# Altium PCB PCB1.PcbDoc
Units mm, origin at the board's own origin, x right, y up, seen from the top; angles counter-clockwise.
Board outline 30.73 x 26.67 mm, 2 copper layers (Top Layer, Bottom Layer); 33 components, 30 nets, 173 pads, 58 vias.
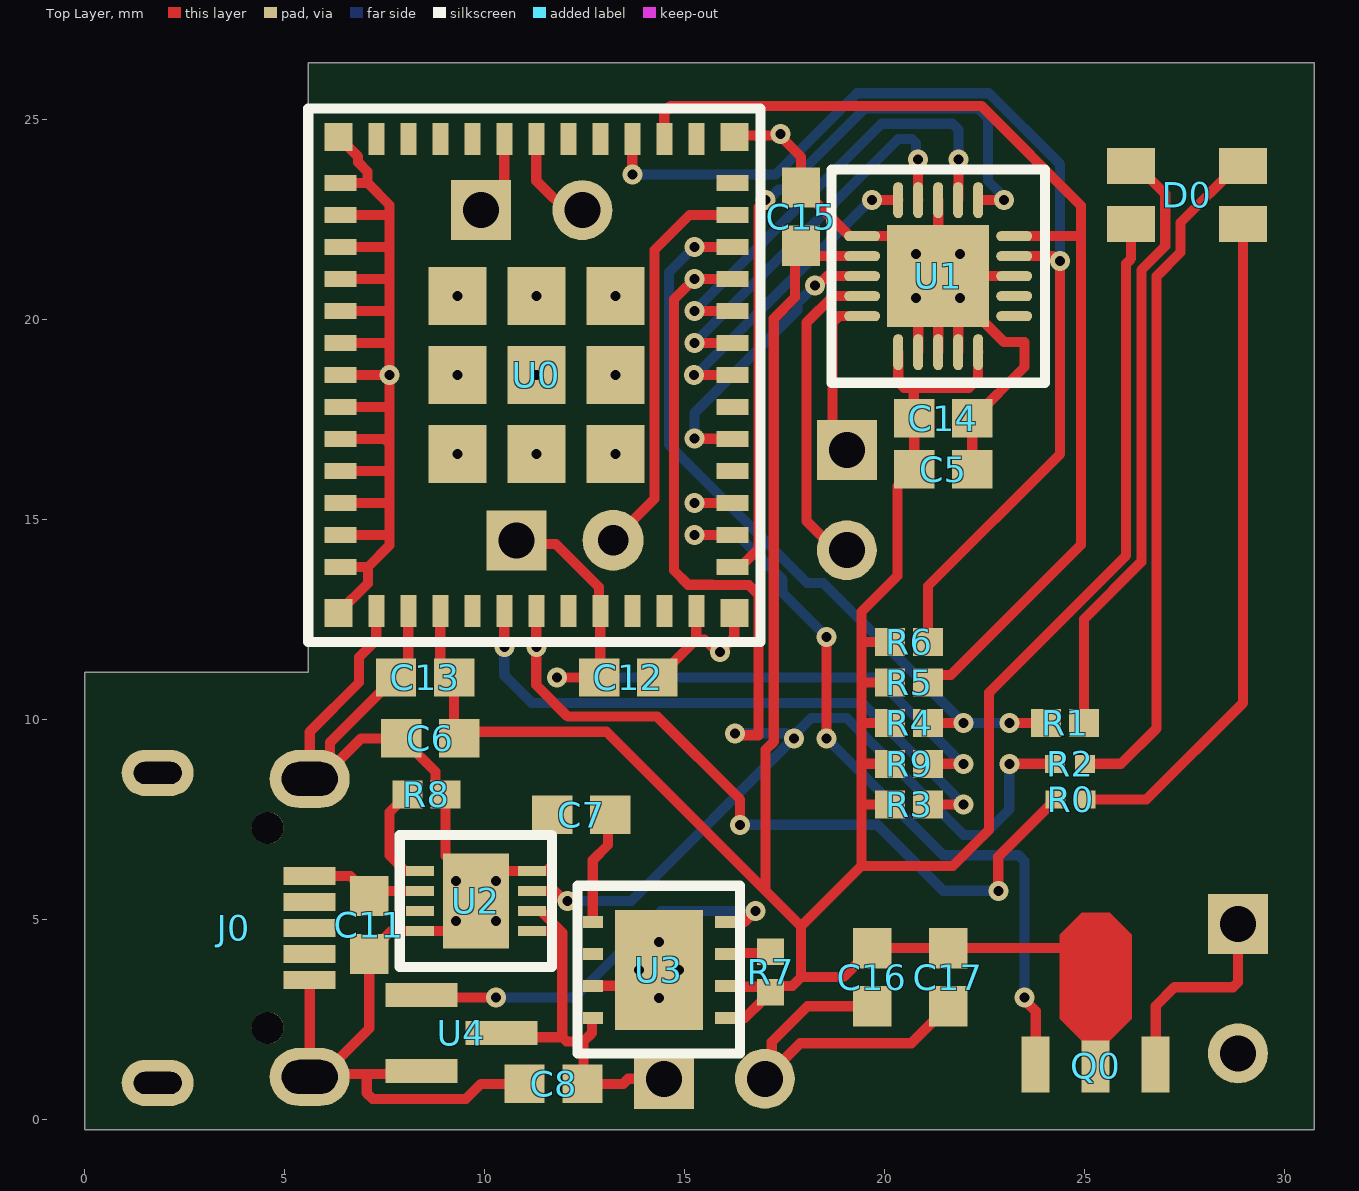
[diagram p0: Top Layer view]
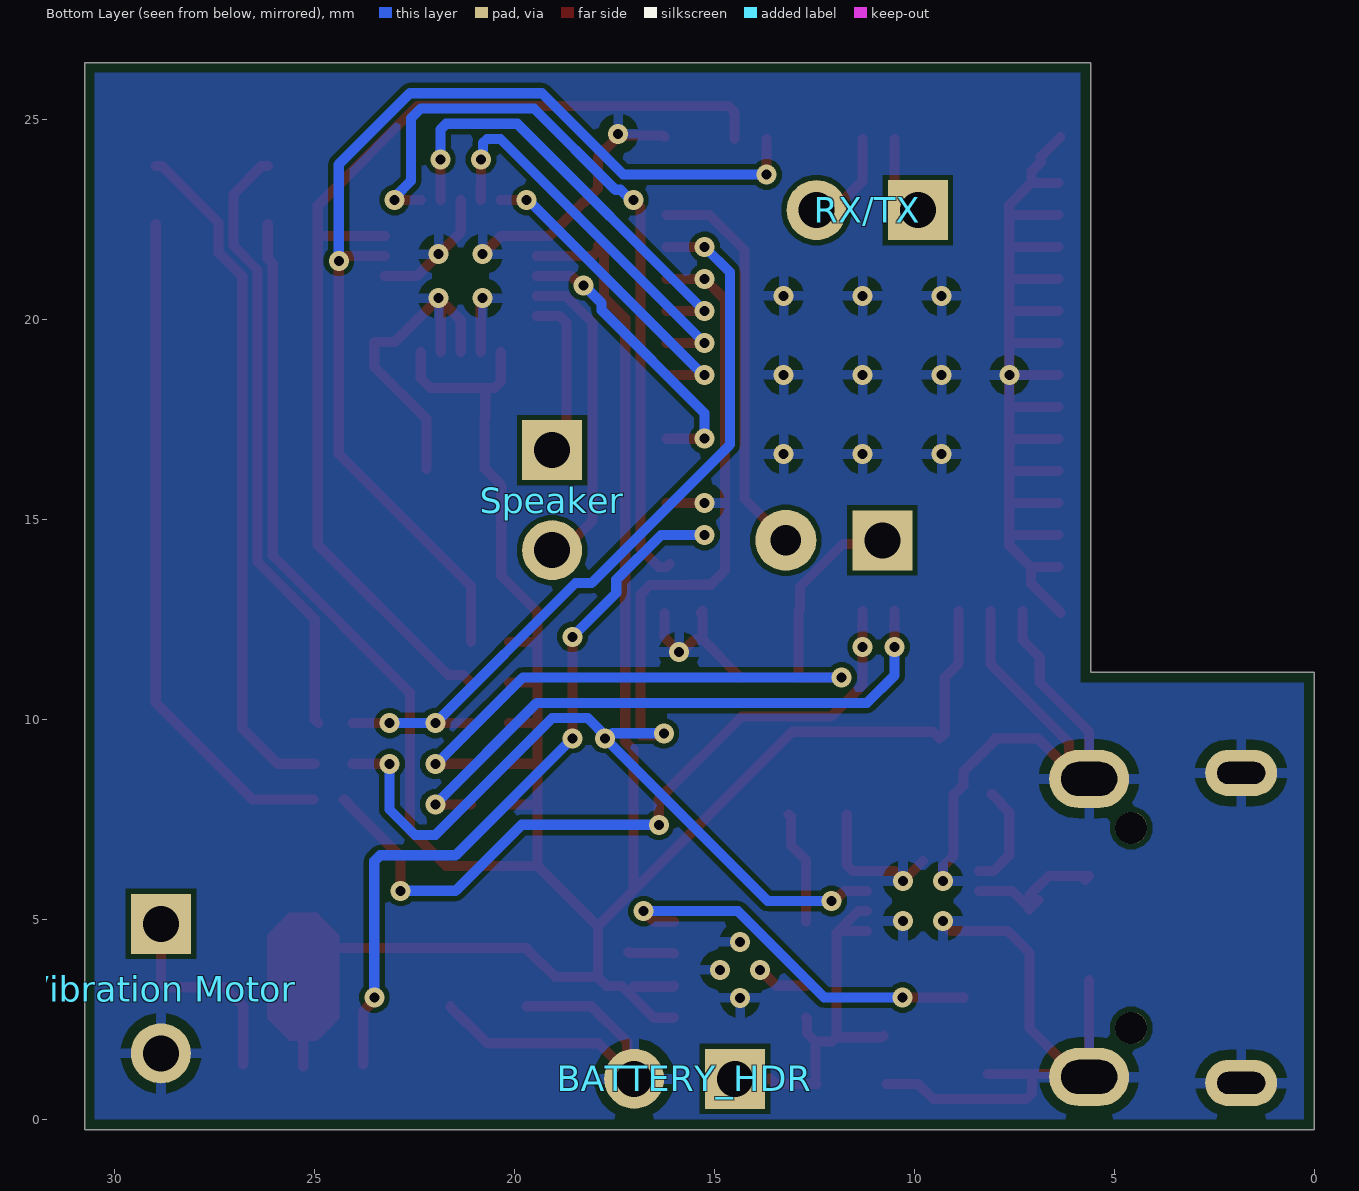
[diagram p1: Bottom Layer view, seen from below]

## Layer stack, top to bottom
Top Solder: solder mask 0.0102, Solder Resist, Dk 3.5
Top Layer: signal copper 0.0356
Dielectric 1: dielectric 0.32, FR-4, Dk 4.8
Bottom Layer: signal copper 0.0356
Bottom Solder: solder mask 0.0102, Solder Resist, Dk 3.5

## Board outline
5.588,26.416 5.588,11.176 0,11.176 0,-0.254 30.734,-0.254 30.734,26.416

## Design rules (kind name [scope] priority, off if disabled: settings)
Clearance [All] p1: gap=0.127 ignorepadtopadclearanceinfootprint=FALSE except(0: Arc-Hole Track-Hole SMDPad-Hole THPad-Hole Via-Hole Fill-Hole Poly-Hole Region-Hole Text-Hole)
ComponentClearance [All] p1: gap=0.127 collisioncheckmode=3 verticalgap=0.254 showdistances=FALSE
HoleSize [All] p1: absolutevalues=TRUE maxlimit=2.54 minlimit=0.25 maxpercent=80.000 minpercent=20.000
HoleToHoleClearance [All] p1: gap=0.127 allowstackedmicrovias=TRUE
MinimumSolderMaskSliver [All] p1: minsoldermaskwidth=0.1
PolygonConnect [All] p1: connectstyle=Relief reliefconductorwidth=0.254 reliefentries=4 polygonreliefangle="90 Angle" airgapwidth=0.254
RoomDefinition Schematic_MuSSAP [InComponentClass('Schematic_MuSSAP')] p1: confinementstyle=ConfineIn formatcopy=TRUE lockcomponents=FALSE outline -11.303,-30.988 39.497,-30.988 39.497,-5.588 -11.303,-5.588
RoutingVias [All] p1: holewidth=0.25 width=0.5 viastyle="Through Hole" minholewidth=0.25 minwidth=0.5 maxholewidth=1 maxwidth=1.5
SolderMaskExpansion [All] p1: expansion=0.102 istentingtop=FALSE
Width [All] p1: maxlimit=0.508 minlimit=0.127 preferedwidth=0.254 minimp=50.000000 maximp=50.000000 favimp=50.000000
26 further rules are at their usual default settings.

## Components (designator, comment, footprint, x,y, rotation, side; value= is the part's Value field where it differs from the comment)
BATTERY_HDR "" HDR1X2#1 14.478,1.016 r0 bottom
C5 "10uF" FP-C0603-CG-IPC_B 21.463,16.256 r180 top
C6 "10uF" FP-C0603-CG-IPC_B 8.636,9.525 r0 top
C7 "0.1uF" FP-C0603-CG-IPC_B 12.41,7.62 r0 top
C8 "10uF" FP-C0603-CG-IPC_B 11.72,0.889 r0 top
C11 "10uF" FP-C0603-CG-IPC_B 7.112,4.862 r270 top
C12 "0.1uF" FP-C0603-CG-IPC_B 13.589,11.049 r180 top
C13 "0.1uF" FP-C0603-CG-IPC_B 8.509,11.049 r0 top
C14 "0.1uF" FP-C0603-CG-IPC_B 21.463,17.526 r180 top
C15 "0.1uF" FP-C0603-CG-IPC_B 17.907,22.57 r270 top
C16 "10uF" FP-C0603-CG-IPC_B 19.685,3.556 r90 top
C17 "10uF" FP-C0603-CG-IPC_B 21.59,3.556 r90 top
D0 "AAA3528LSEEZGKQBKS" FP-AAA3528LSEEZGKQBKS-MFG 27.559,23.114 r180 top
J0 "629105150521" 629105150521 2.724,4.786 r270 top
Q0 "BSS606N H6327" INF-PG-SOT-89_N 25.273,2.921 r90 top
R0 "15" RESC1005X40X25LL05T10 24.644,8.001 r0 top
R1 "62" RESC1005X35X25ML10T10 24.511,9.906 r0 top
R2 "22" RESC1005X40X25LL05T10 24.632,8.89 r180 top
R3 "45k" RESC1005X35X25ML10T10 20.607,7.874 r0 top
R4 "45k" RESC1005X35X25ML10T10 20.607,9.906 r0 top
R5 "3.3k" RESC1005X35X25ML10T10 20.607,10.922 r0 top
R6 "3.3k" RESC1005X35X25ML10T10 20.607,11.938 r0 top
R7 "330k" FP-MCS0402-IPC_A 17.145,3.683 r90 top
R8 "4.99k" RESC1005X35X25ML10T10 8.542,8.128 r180 top
R9 "45k" RESC1005X35X25ML10T10 20.607,8.89 r0 top
RX/TX "" HDR1X2#2 10.033,22.733 r0 bottom
Speaker "" HDR1X2#3 19.05,16.129 r270 bottom
U0 "SMD MODULE, ESP32-C3FH4, PCB ANT   Source:  Datasheet" ESP32C3MINI1H4 11.288,18.612 r90 top
U1 "SSM2518_QFN_4mmx4mmx0.75mm_CP-20-8" QSSM2518_FN50P400X400X80_HS-21N 21.336,21.082 r180 top
U2 "LTC4058EDD-4.2" LT-DD-8_V 9.779,5.461 r180 top
U3 "LP2989AILD-3.3/NOPB" LDC08A 14.35,3.74 r0 top
U4 "MCP112T-290E/TT" SOT-23-TT3_M 9.414,2.159 r0 top
"Vibration Motor" "" HDR1X2#4 28.829,4.191 r270 bottom

## Footprints (in the part's own frame and the unit in brackets; to place one, negate y for a bottom-side part, rotate by r counter-clockwise, add the part's x,y. Pads: shape width x height; smd on the part's side, far side on the other; paste and mask are expansions set on the pad)
629105150521 [mm] "Micro USB 2.0 SMT Type B Horizontal 5 Contacts High Current"
  rect 0.45x1.3 smd: 1(-1.3,2.9) 2(-0.65,2.9) 3(0,2.9) 4(0.65,2.9) 5(1.3,2.9)
  round 0.8 hole 0.8 unplated: MH1(-2.5,1.85) MH2(2.5,1.85)
  oval 1.15x1.8 hole 0.55 slot 1.2 at 90 deg: Shell(-3.875,-0.9) Shell(3.875,-0.9)
  oval 1.45x2 hole 0.85 slot 1.4 at 90 deg: Shell(-3.725,2.9) Shell(3.725,2.9)
  body extent -4,-3.3 4,3.3, height 2.75
ESP32C3MINI1H4 [mil]
  rect 31.5x15.75 smd: 1(-232.28,157.48) 2(-232.28,125.98) 3(-232.28,94.49) 4(-232.28,62.99) 5(-232.28,31.5) 6(-232.28,0) 7(-232.28,-31.5) 8(-232.28,-62.99) 9(-232.28,-94.49) 10(-232.28,-125.98) 11(-232.28,-157.48) 25(232.28,-157.48) 26(232.28,-125.98) 27(232.28,-94.49) 28(232.28,-62.99) 29(232.28,-31.5) 30(232.28,0) 31(232.28,31.5) 32(232.28,62.99) 33(232.28,94.49) 34(232.28,125.98) 35(232.28,157.48)
  rect 15.75x31.5 smd: 12(-188.98,-192.91) 13(-157.48,-192.91) 14(-125.98,-192.91) 15(-94.49,-192.91) 16(-62.99,-192.91) 17(-31.5,-192.91) 18(0,-192.91) 19(31.5,-192.91) 20(62.99,-192.91) 21(94.49,-192.91) 22(125.98,-192.91) 23(157.48,-192.91) 24(188.98,-192.91) 36(188.98,192.91) 37(157.48,192.91) 38(125.98,192.91) 39(94.49,192.91) 40(62.99,192.91) 41(31.5,192.91) 42(0,192.91) 43(-31.5,192.91) 44(-62.99,192.91) 45(-94.49,192.91) 46(-125.98,192.91) 47(-157.48,192.91) 48(-188.98,192.91)
  rect 57.09x57.09 smd: 49(0,0) 50(77.76,77.76) 51(0,77.76) 52(-77.76,77.76) 53(-77.76,0) 54(-77.76,-77.76) 55(0,-77.76) 56(77.76,-77.76) 57(77.76,0)
  rect 27.56x27.56 smd: 58(-234.25,194.88) 59(-234.25,-194.88) 60(234.25,-194.88) 61(234.25,194.88)
FP-AAA3528LSEEZGKQBKS-MFG [mm]
  rect 1.2x0.9 smd paste+0 mask+0: 1(1.4,-0.725) 2(-1.4,-0.725) 3(-1.4,0.725) 4(1.4,0.725)
  body extent -2.1,-1.6 2.1,1.6, height 0.25
FP-C0603-CG-IPC_B [mm]
  rect 1.007x0.958 smd paste+0 mask+0: 1(-0.726,0) 2(0.726,0)
  body extent -1.48,-0.73 1.48,0.73, height 0.25
FP-MCS0402-IPC_A [mm]
  rect 0.665x0.672 smd paste+0 mask+0: 1(-0.504,0) 2(0.504,0)
  body extent -1.04,-0.54 1.04,0.54, height 0.25
HDR1X2#1 [mm] "Connector; Header; 2 Position"
  rect 1.5x1.5 hole 0.9: 1(0,0)
  round 1.5 hole 0.9: 2(2.522,0)
HDR1X2#2 [mm] "Connector; Header; 2 Position"
  rect 1.5x1.5 hole 0.9: 1(-0.127,0)
  round 1.5 hole 0.9: 2(2.405,0)
HDR1X2#3 [mm] "Connector; Header; 2 Position"
  rect 1.5x1.5 hole 0.9: 1(-0.6,0)
  round 1.5 hole 0.9: 2(1.9,0)
HDR1X2#4 [mm] "Connector; Header; 2 Position"
  rect 1.5x1.5 hole 0.9: 1(-0.7,0)
  round 1.5 hole 0.9: 2(2.54,0)
INF-PG-SOT-89_N [mm] "SOT89, 3-Leads, Body 4.5x2.5mm, Pitch 1.5mm, IPC Medium Density"
  rect 1.4x0.7 smd: 1(-1.55,1.5) 3(-1.55,-1.5)
  rect 1.3x0.7 smd: 2(-1.6,0)
  Top Layer region: -0.95,0.35 -0.4,0.9 1.7,0.9 2.25,0.35 2.25,-0.35 1.7,-0.9 -0.4,-0.9 -0.95,-0.35
  body extent -1.05,-2.3 1.55,2.3, height 1.6
LDC08A [mm] "PSON, 8-Leads, Body 4x4mm, Pitch 0.8mm, NSC Recommended"
  rect 0.5x0.3 smd paste-0.15 mask+0.051: 1(-1.65,1.2) 2(-1.65,0.4) 3(-1.65,-0.4) 4(-1.65,-1.2) 5(1.65,-1.2) 6(1.65,-0.4) 7(1.65,0.4) 8(1.65,1.2)
  rect 2.2x3 smd paste-1.5 mask+0.051: 9(0,0)
  body extent -2.05,-2.05 2.05,2.05, height 0.8
LT-DD-8_V [mm] "SON, 8-Leads, Body 3x3mm, Pitch 0.5mm, Thermal Pad 1.65x2.38 mm"
  rect 0.7x0.25 smd mask+0.102: 1(-1.4,0.75) 2(-1.4,0.25) 3(-1.4,-0.25) 4(-1.4,-0.75) 5(1.4,-0.75) 6(1.4,-0.25) 7(1.4,0.25) 8(1.4,0.75)
  rect 1.65x2.38 smd mask+0.102: 9(0,0)
  body extent -1.5,-1.5 1.5,1.5, height 0.8
QSSM2518_FN50P400X400X80_HS-21N [mm] "QFN, 20-Leads, Body 4,00x4,00mm, Pitch 0,50mm, Thermal Pad 2,55x2,55mm, IPC Medium Density"
  oval 0.9x0.25 smd: 1(-1.9,1) 2(-1.9,0.5) 3(-1.9,0) 4(-1.9,-0.5) 5(-1.9,-1) 11(1.9,-1) 12(1.9,-0.5) 13(1.9,0) 14(1.9,0.5) 15(1.9,1)
  oval 0.25x0.9 smd: 6(-1,-1.9) 7(-0.5,-1.9) 8(0,-1.9) 9(0.5,-1.9) 10(1,-1.9) 16(1,1.9) 17(0.5,1.9) 18(0,1.9) 19(-0.5,1.9) 20(-1,1.9)
  rect 2.55x2.55 smd: 21(0,0)
  body extent -2.05,-2.05 2.05,2.05, height 0.8
RESC1005X35X25ML10T10 [mm] "Chip Resistor, 2-Leads, Body 1.00x0.50mm, IPC Low Density"
  rect 0.75x0.7 smd: 1(-0.475,0) 2(0.475,0)
  body extent -0.55,-0.3 0.55,0.3, height 0.35
RESC1005X40X25LL05T10 [mm] "Chip Resistor, 2-Leads, Body 1.00x0.50mm, IPC High Density"
  rect 0.5x0.45 smd: 1(-0.375,0) 2(0.375,0)
  body extent -0.53,-0.27 0.53,0.28, height 0.4
SOT-23-TT3_M [mm] "SOT23, 3-Leads, Body 2.9x1.3mm, Pitch 0.95mm, Lead Span 2.4mm, IPC Low Density"
  rect 1.8x0.6 smd: 1(-1,0.95) 2(-1,-0.95) 3(1,0)
  body extent -0.7,-1.52 0.7,1.53, height 1.12

## Part data
BATTERY_HDR RX/TX Speaker "Vibration Motor": library part "Header 2", "Header, 2-Pin", LatestRevisionDate=17-Jul-2002, LatestRevisionNote="Re-released for DXP Platform.", Publisher="Altium Limited"
C5 C6 C7 C8 C11 C12 C13 C14 C15 C16 C17: library part CMP-2006-03069-2, "CAP CER 0.1UF 25V Y5V 0603", Capacitance=100nF, Case Code (Imperial)=0603, Case Code (Metric)=1608, Dielectric=Y5V, Dielectric Material=Ceramic, Max Operating Temperature=85°C, Min Operating Temperature=-30°C, Package Quantity=1, Tolerance=80%, Voltage=25V, Case/Package=0603, Construction=Flat, Depth=0.8mm, Dissipation Factor=7%, Height=0.8mm, Lead Free="Lead Free", Lead Pitch=0.7mm, Length=1.6mm, Mount="Surface Mount", Number of Pins=2, Packaging="Tape and Reel", Radiation Hardening=No, REACH SVHC="No SVHC", RoHS Compliant=Yes, Series=C, Termination=SMD/SMT, Thickness=0.034inch, Voltage Rating=25V, Voltage Rating (DC)=25V, Width=0.031inch
D0: library part CMP-44529-000043-1, "LED RGB CLEAR 4SMD", Case/Package=PLCC, Color=Blue, Forward Voltage=2.7V, Lens Color=Colorless, Test Current=2mA, Dominant Wavelength=465nm, Height=2.1mm, Length=3.2mm, Lens Transparency=Clear, Luminous Intensity=30mcd, Mount="Surface Mount", Number of Pins=4, Packaging="Tape and Reel", Viewing Angle=120°, Width=2.8mm
J0: library part CMP-1502-03252-1, "Micro USB 2.0 Type B Receptacle WR-COM, Horizontal, SMT, with Pegs, High Current at Pin 1 & Pin 5", Contact Resistance=30mOhm, Manufacturer="Wurth Elektronik", Operating Temperature=-40to85degC, Rated Current=3A, Working Voltage=30VAC, Connector Type=MicroUSB2.0TypeB, Datasheet URL=https://katalog.we-online.de/em/datasheet/629105150521.pdf, Gender=Receptacle, Manufacturer URL=http://www.we-online.de, Mounting Technology=SMT, Orientation=Horizontal, Package Reference=629105150521, Packaging=TapeandReel, Part Number=629105150521, Publisher=WurthElektronik
Q0: library part CMP-1149-00049-1, "OptiMOS-3 Small-Signal-Transistor, 60 V VDS, 3.2 A ID, PG-SOT-89, Reel, Green", Manufacturer=Infineon, ComponentLink1Description="Manufacturer URL", ComponentLink1URL=http://www.infineon.com/, ComponentLink2Description=Datasheet, ComponentLink2URL=http://www.infineon.com/dgdl/BSS606N_2.2.pdf?folderId=db3a3043156fd573011622e10b5c1f67&fileId=db3a30433dfcb54c013dfd4f43ed0120, ComponentLink3Description="Package Specification", ComponentLink3URL=http://www.infineon.com/cms/packages/SMD_-_Surface_Mounted_Devices/SOT/SOT089_xSC62x.html?__locale=en, DatasheetVersion="Rev. 2.2", Green=TRUE, Halogen-free=TRUE, ID (max)="3.2Â A", Mounting Technology="Surface Mount", PackageDescription="3-Pin Small Outline Transistor Package, 4.5 x 2.5 mm Body, 1.5 mm Pitch", PackageReference=PG-SOT-89, PackageVersion=Apr-08, Packing=Reel, PartNumber="BSS606N H6327", Polarity=N, RDS (on) (max)="60 mOhm", RevisionNote="Lost Devices pt2", VDS (max)="60 V"
R0: library part CMP-2002-07413-1, Manufacturer="Yageo / Phycomp", Part Number=RC0402FR-0715RL
R1 R3 R4 R5 R6 R8 R9: library part CMP-2002-02949-1, Manufacturer=Yageo, Part Number=RT0402BRD073KL
R2: library part CMP-2002-07520-1, Manufacturer="Yageo / Phycomp", Part Number=RC0402FR-0722RL
R7: library part CMP-02407-001123-1, "RES SMD 1.2K OHM 1% 1/10W 0402", Case/Package=0402, Max Operating Temperature=125°C, Max Power Dissipation=100mW, Min Operating Temperature=-55°C, Package Quantity=10000, Resistance=270kR, Temperature Coefficient=50ppm/°C, Tolerance=1%, Composition="Thin Film", Contact Plating=Tin, Depth=0.5mm, Height=0.015inch, Lead Free="Lead Free", Length=0.039inch, Military Standard=Not, Number of Terminations=2, Packaging="Tape and Reel", Radiation Hardening=No, Width=0.02inch
U0: library part ESP32-C3-MINI-1-H4, Manufacturer_Name="Espressif Systems", Package=ESP32C3MINI1H4, DeviceSetName=ESP32-C3-MINI-1-H4, GateName_1=G$1, Height=2.55mm, LibraryName=ESP32-C3-MINI-1-H4, Manufacturer_Part_Number=ESP32-C3-MINI-1-H4, Mouser_Part_Number=356-ESP32-C3-MINI1H4, Mouser_Price-Stock=https://www.mouser.co.uk/ProductDetail/Espressif-Systems/ESP32-C3-MINI-1-H4?qs=stqOd1AaK78JkwNX13Q9hQ%3D%3D, SymbolName_1=ESP32-C3-MINI-1-H4
U2: library part CMP-0471-00145-1, "Standalone Linear Li-Ion Battery Charger with Thermal Regulation, 4.25 to 6.5 V Vin, 8-pin SON (DD-8), -40 to 85 degC", Float Voltage="4.2 V", Manufacturer="Linear Technology", Max Charge Current(A)=0.95, Battery Chemistry="Li-Ion, Li-Polymer", Charge Termination=C/10, Code_JEDEC=MO-229, ComponentLink1Description="Manufacturer URL", ComponentLink1URL=http://www.linear.com/, ComponentLink2Description=Datasheet, ComponentLink2URL=http://cds.linear.com/docs/en/datasheet/405842fs.pdf, ComponentLink3Description="Package Specification", ComponentLink3URL=http://cds.linear.com/docs/en/packaging/DFN_8_05-08-1698.pdf, Mounting Technology="Surface Mount", Number of Cells=1, PackageDescription="8-Pin Plastic DFN, Body 3 x 3 mm, Pitch 0.5 mm", PackageReference=DD-8, PackageVersion=Jun-10, PartNumber=LTC4058EDD-4.2, RoHS=FALSE, Type of Charger=Linear, Vin Max(V)=6.5, Vin Min(V)=4.25
U3: library part CMP-0062-01460-2, "Micropower/Low Noise, 500 mA Ultra Low-Dropout Regulator, 8-pin LLP, Pb-Free", Manufacturer="National Semiconductor", PackageTopMarking=NS*UZXYTT*L01JA, PowerWise=N, ComponentLink1Description="LP2989 Datasheet", ComponentLink1URL=http://www.national.com/ds/LP/LP2989.pdf, ComponentLink2Description="LP2989 Web Page", ComponentLink2URL=http://www.national.com/pf/LP/LP2989.html, ComponentLink3Description="LDC08A Package Page", ComponentLink3URL=http://www.national.com/packaging/folders/ldc08a.html, CompType="LDO IC", DatasheetVersion=Feb-2005, PackageDescription="LLP, Plastic, Dual, 4 x 4 x 0.75mm Body, 8 Lead, 0.8mm Pitch", PackageReference=LDC08A, PackageVersion="revB, Jun-2003", PinCount=8, RevisionNote="Component URLs added", RoHS=Y
U4: library part CMP-0130-00041-1, "1.75Î¼A Micropower Voltage Detector, Push-Pull Output, 2.90V, 3-Pin SOT-23, Extended Temperature, Tape and Reel", Code_IPC=SOT23-3, DatasheetVersion="revD, Jun-2005", PackageDescription="3-Lead Plastic Small Outline Transistor (TT) [SOT-23]", PackageReference=SOT-23-TT3, PackageVersion="revBB, Aug-2009"

## Free pads (board coordinates)
  rect 1.5x1.5 hole 0.9: 4(10.795,14.478)
  round 1.524 hole 0.762: 5(13.208,14.478)

## Via types
v1: diameter 0.5, hole 0.25, Top Layer to Bottom Layer, 58 vias

## Nets (pads, with @x,y where several pads share a name; then routed paths per layer and width w, separated by ;. In a path a pad name is that pad's centre, name@x,y a point inside that pad or via, vN(x,y) a via of type N, cw(c..) or ccw(c..) an arc to the next point about the centre after c; other vN are vias at no path point)
3V3: C5.2 C6.2 C13.2 C14.2 C15.2 C16.2 C17.2 D0.4 Q0.2 R3.1 R4.1 R5.1 R6.1 R7.1 R9.1 U0.3 U1.12 U1.16 U1.20 U3.5 U3.6 | length 89.4
  Top Layer w0.254: U0.3 8.888,11.396 C13.2 9.235,9.652 C6.2 9.526,9.689 13.044,9.689 17.018,5.715 ; U3.5 16.506,2.54 16.936,2.97 16.936,2.974 17.141,3.179 R7.1 ; U3.6 16.023,3.317 17.007,3.317 R7.1 ; C15.2@17.906,21.717 18.041,21.582 U1.12 ; C15.2@17.906,21.843 17.756,21.693 17.756,20.55 17.223,20.017 17.223,9.445 17.018,9.24 17.018,5.715 ; R3.1 19.419,7.874 ; R9.1 19.419,8.89 ; R4.1 19.419,9.906 ; R5.1 19.419,10.922 ; R6.1 19.419,11.938 ; U1.16 20.336,18.437 20.485,18.288 20.723,18.288 ; U1.20 22.334,19.18 22.334,18.524 22.098,18.288 20.723,18.288 ; Q0.2 25.273,4.133 25.124,4.282 C17.2 C16.2 19.685,4.258 19.333,3.906 19.309,3.906 18.959,3.556 17.907,3.556 ; D0.4 26.159,21.519 26.035,21.395 26.035,14.097 22.606,10.668 22.606,7.239 21.705,6.338 19.419,6.338 ; 17.018,5.715 17.907,4.826 ; R7.1 17.302,3.337 17.688,3.337 17.907,3.556 ; 17.907,3.556 17.907,4.826 ; 17.907,4.826 19.419,6.338 ; 19.419,6.338 19.419,7.874 ; 19.419,7.874 19.419,8.89 ; 19.419,8.89 19.419,9.906 ; 19.419,9.906 19.419,10.922 ; 19.419,10.922 19.419,11.938 ; 19.419,11.938 19.419,12.688 20.32,13.589 20.32,15.839 20.361,15.88 20.361,15.904 20.713,16.256 C5.2 C14.2 20.723,17.54 20.723,18.288
AUD_EN: U0.16 U1.13 | length 7.3
  Top Layer w0.254: v1(15.24,17.018) 15.243,17.015 16.185,17.015 U0.16 ; v1(18.26,20.851) 18.327,20.851 18.558,21.082 U1.13
  Bottom Layer w0.254: v1(15.24,17.018) 15.24,17.653 17.813,20.226 17.813,20.403 v1(18.26,20.851)
BAT+: BATTERY_HDR.1 C8.2 U2.1 U2.2 U3.4 U4.3 | length 9.8
  Top Layer w0.254: U4.3@10.763,2.093 10.802,2.054 11.938,2.054 ; U2.1 11.789,4.711 ; U2.2 11.4,5.211 11.938,4.673 11.938,2.054 ; C8.2 C8.2@12.469,0.889 ; U3.4 12.677,2.517 12.677,2.158 12.469,1.95 ; BATTERY_HDR.1 13.589,1.016 13.462,0.889 C8.2@12.469,0.889 ; 11.938,2.054 12.042,1.95 12.469,1.95 ; C8.2@12.469,0.889 12.469,1.95
BCLK: U0.20 U1.7 | length 11.3
  Top Layer w0.254: v1(15.24,20.212) U0.20@16.188,20.212 ; U1.7 21.838,22.984 21.838,23.366 21.844,23.372 v1(21.844,24.003)
  Bottom Layer w0.254: v1(15.24,20.212) 19.92,24.892 21.695,24.892 21.844,24.743 v1(21.844,24.003)
BLUE_LED: R0.1 U0.6 | length 18.8
  Top Layer w0.254: U0.6 v1(11.288,11.811) 11.288,10.859 12.077,10.07 14.314,10.07 16.383,8.001 v1(16.383,7.366) ; v1(22.838,5.715) 22.838,6.57 24.146,7.878 24.146,7.903 24.244,8.001 R0.1
  Bottom Layer w0.254: v1(16.383,7.366) 19.812,7.366 21.463,5.715 v1(22.838,5.715)
EN: C12.2 pad.4 R9.2 U0.8 | length 17.8
  Top Layer w0.254: pad.4 10.888,14.385 11.777,14.385 12.853,13.309 12.853,12.747 U0.8 12.888,11.074 C12.2 v1(11.811,11.049) ; R9.2 v1(21.971,8.89)
  Bottom Layer w0.254: v1(11.811,11.049) 19.781,11.049 21.94,8.89 v1(21.971,8.89)
GND: "Vibration Motor.2" BATTERY_HDR.2 C5.1 C6.1 C7.1 C8.1 C11.2 C12.1 C13.1 C14.1 C15.1 C16.1 C17.1 J0.5 J0.Shell R8.1 U0.1 U0.2 U0.11 U0.14 U0.36 U0.37 U0.38 U0.39 U0.40 U0.41 U0.42 U0.43 U0.44 U0.45 U0.46 U0.47 U0.48 U0.49 U0.50 U0.51 U0.52 U0.53 U0.54 U0.55 U0.56 U0.57 U0.58 U0.59 U0.60 U0.61 U1.3 U1.8 U1.11 U1.17 U1.18 U1.19 U2.4 U2.8 U2.9 U3.3 U3.9 U4.2 | length 98.8
  Top Layer w0.254: J0.5 5.624,1.061 J0.Shell@5.94,1.061 ; J0.Shell@5.94,1.102 J0.Shell@5.972,1.133 ; J0.Shell@5.94,1.133 J0.Shell@5.972,1.133 ; U0.58 7.081,13.405 7.081,13.812 ; U0.61 6.834,24.066 6.834,23.926 7.068,23.692 7.068,23.412 ; U0.48 7.081,13.812 ; U0.47 7.613,14.612 7.62,14.605 ; U0.46 7.538,15.412 7.62,15.494 ; U0.45 7.537,16.212 7.62,16.129 ; U0.44 7.499,17.012 7.62,16.891 ; U0.43 7.559,17.812 7.62,17.752 ; U0.42 v1(7.62,18.612) ; U0.41 7.601,19.412 7.62,19.431 ; U0.40 7.601,20.212 7.62,20.193 ; U0.39 7.563,21.012 7.62,20.955 ; U0.38 7.525,21.812 7.62,21.717 ; U0.37 7.614,22.612 7.62,22.606 ; U0.36 7.068,23.412 ; U0.1 7.288,11.987 6.858,11.557 6.858,10.922 5.624,9.688 J0.Shell@5.624,8.511 ; U0.2 8.088,11.378 6.128,9.418 6.128,9.015 J0.Shell@5.624,8.511 ; U4.2@8.163,1.133 7.052,1.133 ; v1(9.279,4.961) 9.279,4.909 9.081,4.711 U2.8 8.377,4.709 7.661,4.709 7.112,4.16 C11.2 7.112,2.274 J0.Shell@5.972,1.133 ; v1(9.279,5.961) 9.279,6.326 9.017,6.588 R8.1 8.992,8.128 8.769,8.351 8.769,8.69 7.994,9.465 7.994,9.525 C6.1 6.913,9.525 5.899,8.511 J0.Shell@5.624,8.511 ; U2.9@9.779,6.461 v1(10.279,5.961) 10.279,6.013 10.477,6.211 U2.4 11.535,6.211 11.684,6.36 C7.1 ; C8.1@10.682,0.889 9.906,0.889 9.525,0.508 7.857,0.508 7.2,0.508 7.052,0.657 7.052,1.133 ; U3.3 13.45,3.34 v1(13.85,3.74) ; C12.1 14.339,11.049 15.288,11.998 ; v1(15.24,15.412) U0.14 ; U0.11@15.338,12.662 U0.11 15.288,11.998 ; U0.59 16.238,12.047 v1(15.875,11.684) 15.808,11.684 15.494,11.998 15.288,11.998 ; U0.60 16.276,24.6 17.361,24.6 v1(17.399,24.638) 17.399,24.571 17.907,24.063 C15.1 17.907,23.272 18.259,22.919 18.283,22.919 19.113,22.09 19.113,22.084 19.115,22.082 U1.11 20.336,22.082 v1(20.786,21.632) ; BATTERY_HDR.2 BATTERY_HDR.2@17.174,1.19 ; C16.1 18.07,2.83 17.174,1.934 BATTERY_HDR.2@17.174,1.19 ; v1(20.786,20.532) 20.836,20.482 U1.17 ; U1.18 21.336,19.982 v1@21.836,20.482 ; U1.8 21.336,22.182 v1(21.886,21.632) 22.436,21.082 U1.3 ; C17.1 21.59,2.806 21.238,2.454 21.214,2.454 20.665,1.905 17.889,1.905 BATTERY_HDR.2@17.174,1.19 ; U1.19 v1@21.836,20.482 ; C5.1 C14.1 22.213,17.526 23.495,18.808 23.495,19.431 22.987,19.431 v1(21.886,20.532) v1@21.836,20.482 ; J0.Shell@5.972,1.133 7.052,1.133 ; 7.068,23.412 7.62,22.86 7.62,22.606 ; 7.081,13.812 7.62,14.351 7.62,14.605 ; 7.62,14.605 7.62,15.494 ; 7.62,15.494 7.62,16.129 ; 7.62,16.129 7.62,16.891 ; 7.62,16.891 7.62,17.752 ; 7.62,17.752 v1(7.62,18.612) ; v1(7.62,18.612) 7.62,19.431 ; 7.62,19.431 7.62,20.193 ; 7.62,20.193 7.62,20.955 ; 7.62,20.955 7.62,21.717 ; 7.62,21.717 7.62,22.606
  other v1: 14.35,3.04 14.85,3.74 14.35,4.44 10.279,4.961 9.313,16.637 11.288,16.637 13.263,16.637 9.313,18.612 11.288,18.612 13.263,18.612 9.313,20.587 11.288,20.587 13.263,20.587
GRN_LED: R2.2 U0.21 U2.3 | length 34
  Top Layer w0.254: U2.3 11.181,5.709 11.75,5.709 11.998,5.461 v1(12.065,5.461) ; U0.21 v1(15.24,21.012) 14.732,20.504 14.732,13.723 15.089,13.366 15.674,13.366 15.683,13.358 16.601,13.358 16.842,13.117 16.842,9.603 16.84,9.605 16.303,9.605 v1(16.256,9.652) ; v1(23.114,8.89) R2.2@24.036,8.89
  Bottom Layer w0.254: v1(12.065,5.461) 13.663,5.461 v1(17.727,9.525) 17.66,9.525 v1@17.657,9.529 ; v1(16.256,9.652) 17.533,9.652 v1@17.657,9.529 ; v1(23.114,8.89) 23.114,7.747 22.479,7.112 21.971,7.112 19.05,10.033 18.161,10.033 v1@17.657,9.529
IO2: R3.2 U0.5 | length 15.3
  Top Layer w0.254: v1(10.488,11.811) U0.5 ; R3.2 v1(21.971,7.874)
  Bottom Layer w0.254: v1(10.488,11.811) 10.488,11.102 11.176,10.414 19.431,10.414 v1(21.971,7.874)
IO8: R1.1 R4.2 U0.22 | length 19.4
  Top Layer w0.254: v1(15.24,21.812) U0.22 ; R4.2 v1(21.971,9.906) ; v1(23.114,9.906) R1.1
  Bottom Layer w0.254: v1(15.24,21.812) 14.605,21.177 14.605,16.87 18.063,13.411 18.466,13.411 v1(21.971,9.906) v1(23.114,9.906)
IO9: pad.5 U0.23 | length 10
  Top Layer w0.254: pad.5 14.242,15.512 14.242,21.735 15.119,22.612 U0.23
LDO_SD: U3.8 U4.1 | length 9.8
  Top Layer w0.254: U4.1@8.763,3.043 8.766,3.046 10.285,3.046 v1(10.287,3.048) ; U3.8 16.497,4.94 v1(16.764,5.207)
  Bottom Layer w0.254: v1(10.287,3.048) 12.245,3.048 14.404,5.207 v1(16.764,5.207)
LRCLK: U0.19 U1.9 | length 10.1
  Top Layer w0.254: v1(15.24,19.412) U0.19 ; v1(20.828,24.003) 20.828,23.372 20.834,23.366 20.834,22.984 U1.9
  Bottom Layer w0.254: v1(15.24,19.412) 20.339,24.511 20.679,24.511 20.781,24.409 20.781,24.05 v1(20.828,24.003)
MCLK: U0.12 U1.6 | length 19.2
  Top Layer w0.254: U0.12@16.115,13.885 U0.12 16.388,13.812 16.842,14.266 16.842,22.811 v1(17.018,22.987) ; U1.6 22.336,22.985 22.338,22.987 v1(22.987,22.987)
  Bottom Layer w0.254: v1(17.018,22.987) 17.085,22.987 17.339,23.241 17.469,23.241 19.501,25.273 22.33,25.273 22.581,25.022 22.581,23.46 22.987,23.054 v1(22.987,22.987)
MOT_EN: Q0.1 U0.13 | length 19.5
  Top Layer w0.254: v1(15.24,14.612) U0.13 ; v1(18.542,9.525) v1(18.542,12.065) ; v1(23.495,3.048) 23.495,2.981 23.773,2.703 Q0.1
  Bottom Layer w0.254: v1(15.24,14.612) 16.324,14.612 17.446,13.49 17.446,13.161 v1(18.542,12.065) ; v1(18.542,9.525) 21.463,6.604 23.346,6.604 23.495,6.455 v1(23.495,3.048)
NetC7_2: C7.2 U3.1 | length 2.9
  Top Layer w0.254: U3.1 12.7,6.477 13.081,6.858 13.081,7.565 C7.2
NetD0_1: D0.1 R1.2 | length 15.3
  Top Layer w0.254: R1.2@24.892,9.906 24.983,9.997 24.983,12.506 26.416,13.939 26.416,21.237 27.013,21.834 27.013,23.135 26.309,23.839 D0.1
NetD0_2: D0.2 R2.1 | length 17.2
  Top Layer w0.254: R2.1@24.986,8.89 25.908,8.89 26.797,9.779 26.797,21.079 27.394,21.676 27.394,22.424 28.809,23.839 D0.2
NetD0_3: D0.3 R0.2 | length 16.9
  Top Layer w0.254: R0.2 26.543,8.001 28.959,10.417 D0.3
NetQ0_3: "Vibration Motor.1" Q0.3 | length 6
  Top Layer w0.254: Q0.3 26.773,2.835 27.24,3.302 28.702,3.302 28.829,3.429 28.829,4.891 28.315,4.377
NetR7_2: R7.2 U3.7 | length 1.2
  Top Layer w0.254: U3.7 16.023,4.163 17.121,4.163 R7.2
NetR8_2: R8.2 U2.5 | length 2.6
  Top Layer w0.254: R8.2 8.042,8.128 7.819,7.905 7.819,7.88 7.62,7.681 7.62,6.604 8.013,6.211 U2.5
NetSpeaker_1: Speaker.1 U1.15 | length 4.1
  Top Layer w0.254: Speaker.1 18.692,17.087 18.692,19.917 18.858,20.082 U1.15
NetSpeaker_2: Speaker.2 U1.14 | length 7.9
  Top Layer w0.254: Speaker.2 18.776,14.229 18.039,14.966 18.039,19.917 18.704,20.582 U1.14
RXD0: RX/TX.2 U0.30 | length 2.1
  Top Layer w0.254: U0.30 11.288,23.466 11.684,23.07 RX/TX.2@12.065,22.733
SCL: R5.2 U0.26 U1.5 | length 27.6
  Top Layer w0.254: U0.26 14.488,25.18 14.646,25.338 22.414,25.338 24.908,22.844 24.908,22.082 ; R5.2 21.269,11.109 21.65,11.109 21.866,11.325 24.908,14.367 24.908,22.082 ; U1.5 24.908,22.082
SDA: R6.2 U0.27 U1.4 | length 27.6
  Top Layer w0.254: v1(13.688,23.622) U0.27 ; R6.2 21.082,13.335 24.384,16.637 v1@24.384,21.445 ; U1.4 24.198,21.582 24.317,21.463 v1(24.384,21.463)
  Bottom Layer w0.254: v1(13.688,23.622) 17.272,23.622 19.304,25.654 22.606,25.654 24.384,23.876 v1(24.384,21.463)
SDATA: U0.18 U1.10 | length 7.9
  Top Layer w0.254: v1(15.236,18.616) 15.238,18.614 16.186,18.614 U0.18 ; v1(19.685,22.987) 20.334,22.987 20.336,22.985 U1.10
  Bottom Layer w0.254: v1(15.236,18.616) 15.279,18.616 19.65,22.987 v1(19.685,22.987)
TXD0: RX/TX.1 U0.31 | length 2
  Top Layer w0.254: RX/TX.1 10.488,23.315 U0.31
VBUS: C11.1 J0.1 U2.6 | length 3.6
  Top Layer w0.254: J0.1@5.722,5.988 J0.1 6.638,6.086 C11.1@7.112,5.612 ; C11.1@6.887,5.478 6.91,5.478 C11.1@7.112,5.276 ; C11.1@7.112,5.253 C11.1@7.112,5.276 ; U2.6 7.547,5.711 C11.1@7.112,5.276
pads on no net: J0.2 J0.3 J0.4 J0.MH1 J0.MH2 U0.4 U0.7 U0.9 U0.10 U0.15 U0.17 U0.24 U0.25 U0.28 U0.29 U0.32 U0.33 U0.34 U0.35 U1.1 U1.2 U1.21 U2.7 U3.2

## Polygon pours and split planes (outlines as drawn)
GND on Bottom Layer "GND_L02_P000" (solid, pour order 0): 30.48,26.162 5.842,26.162 5.842,10.922 0.254,10.922 0.254,0 30.48,0

## Silkscreen, mask and mechanical layers (free items; w line width, h text height)
Top Overlay:
  lines w0.254: 5.588,11.938 16.891,11.938 16.891,25.273 5.588,25.273 5.588,11.938 ; 7.874,3.81 11.684,3.81 11.684,7.112 7.874,7.112 7.874,3.81 ; 12.319,1.651 16.383,1.651 16.383,5.842 12.319,5.842 12.319,1.651 ; 18.669,18.415 24.003,18.415 24.003,23.749 18.669,23.749 18.669,18.415

## Text inside footprints (layer, text, board x,y; h text height)
J0: Top 3D Body "PCB Edge" at -0.576,6.086 h0.41 r270